# Altium PCB Mother_Board.PcbDoc (part 2 of 2)
Units mil, origin at the board's own origin, x right, y up, seen from the top; angles counter-clockwise.
Board outline 4940 x 2025 mil, 2 copper layers (Top Layer, Bottom Layer), stack 71.6 mil thick; 136 components, 138 nets, 424 pads, 117 vias.
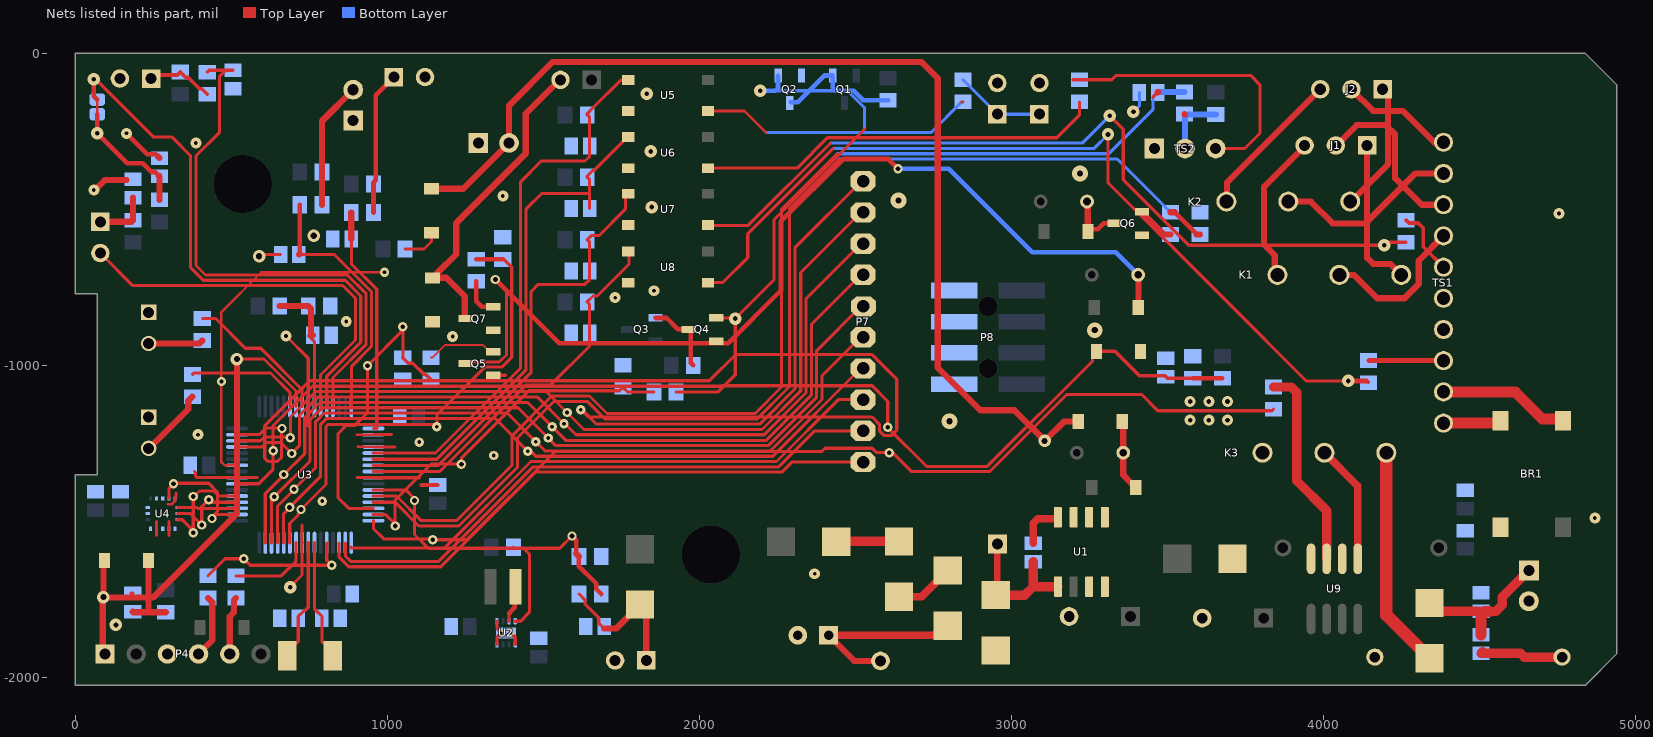
[diagram p2: the nets of this part, all layers, seen from the top]

## Via types
v1: diameter 30, hole 15, Top Layer to Bottom Layer, tented both sides, 29 vias
v2: diameter 40, hole 15, Top Layer to Bottom Layer, tented both sides, 24 vias
v3: diameter 40, hole 20, Top Layer to Bottom Layer, tented both sides, 14 vias
v4: diameter 35, hole 12, Top Layer to Bottom Layer, tented both sides, 13 vias
v5: diameter 30, hole 12, Top Layer to Bottom Layer, tented both sides, 10 vias
v6: diameter 35, hole 15, Top Layer to Bottom Layer, tented both sides, 10 vias
v7: diameter 50, hole 20, Top Layer to Bottom Layer, tented both sides, 9 vias
v8: diameter 30, hole 12.01, Top Layer to Bottom Layer, tented both sides, 3 vias
v9: diameter 19.68, hole 7.87, Top Layer to Bottom Layer, tented top, 2 vias
v10: diameter 30, hole 15, Top Layer to Bottom Layer, 1 vias
v11: diameter 45, hole 20, Top Layer to Bottom Layer, tented both sides, 1 vias
v12: diameter 50, hole 25, Top Layer to Bottom Layer, tented both sides, 1 vias

## Nets (pads, with @x,y where several pads share a name; then routed paths per layer and width w, separated by ;. In a path a pad name is that pad's centre, name@x,y a point inside that pad or via, vN(x,y) a via of type N, cw(c..) or ccw(c..) an arc to the next point about the centre after c; other vN are vias at no path point) (continued)
GND: BR1.4 C2.2 C3.2 C4.2 C5.2 C6.2 C7.2 C8.2 C9.1 C10.2 C11.1 C12.2 C13.2 C14.1 C15.2 C16.2 C17.2 C18.2 C19.2 C20.2 C21.2 C22.2 C23.2 C24.2 C25.2 C26.2 C27.2 C28.2 C30.2 C46.2 C47.2 CONN1.2 CONN3.2 CONN4.2 CONN5.2 CONN6.2 CR4.1 D2.1 D3.2 D4.2 D10.1 P4.3 P5.2 P8.1 P8.2 P8.3 P8.4 Q2.2 Q4.2 Q5.2 Q6.2 Q7.2 R3.1 R5.1 R8.1 R23.2 R37.2 R40.2 R41.1 R43.2 TS1.4 TS1.5 TS2.1 TS3.1 TS4.1 TVS1.1 U1.6 U2.1 U2.4 U2.5 U2.9 U3.9 U3.18 U3.20 U3.25 U3.41 U3.56 U4.5 U4.10 U4.12 U5.3 U6.3 U7.3 U8.3 U9.1 | length 1994.4
  Top Layer w8: 295.33,-1444.66 309.16,-1444.66 309.23,-1444.6 309.93,-1444.6 319.37,-1435.16 ; 901.66,-1222.05 955.5,-1222.05 955.85,-1221.7 ; 904.46,-1261.42 955.5,-1261.42 ; 955.88,-1221.67 1012.81,-1221.67
  Top Layer w10: 178.07,-1730.36 183.79,-1730.36 ; 260.32,-1545 260.32,-1500 ; 299.68,-1545 299.68,-1500 ; 319.37,-1435.16 319.37,-1426.77 319.37,-1424.96 321.98,-1422.35 321.98,-1409.07 ; 381.71,-1340 384.56,-1342.85 384.56,-1353.99 390.42,-1359.85 453.58,-1359.85 517.91,-1359.84 ; 518.5,-1359.84 583.3,-1359.84 ; v3(588.95,-650.62) 594.57,-645 657.68,-645 ; v4(675,-905.67) 746.26,-976.93 746.26,-1131.5 ; v2@689.05,-1709.55 726.57,-1672.03 726.57,-1568.5 ; 726.57,-1512.41 726.57,-1537.11 726.81,-1537.35 726.81,-1568.16 727.16,-1568.5 ; 903.3,-1359.84 955.5,-1359.84 ; 955.5,-1261.42 1023.63,-1261.42 ; 955.85,-1221.7 986.66,-1221.7 ; 986.69,-1221.67 1012.81,-1221.67 ; 1350.94,-1894.8 1350.94,-1871.18 v9(1364.72,-1857.4) 1350.94,-1843.62 1350.94,-1820 ; v9(1396.22,-1857.4) 1410,-1871.18 1410,-1894.8
  Top Layer w12: 746.84,-1192.48 746.84,-1131.5 ; 955.5,-1359.84 1102.3,-1359.84 ; 1108.74,-1383.46 1161.69,-1383.46 ; Q5.2@1339.29,-1031.54 1377.73,-1031.54
  Top Layer w15: v4(163.61,-256.43) 230.81,-323.63 258.15,-323.63 265.53,-331.01
  Top Layer w20: v4@65,-435 93.94,-406.06 163.61,-406.06 ; 265.53,-331.01 270,-335.47
  Bottom Layer w10: v2(3391.2,-187.64) 3410.47,-168.36 C21.2@3410.47,-125
  other v2: 130,-1831.9 689.05,-1710.94 1846.99,-492.68 1843.69,-314.27 1830.94,-129.66
  other v3: 764.45,-584.79
  other v4: 2369.47,-1667.99 4870,-1489.34 393.18,-1222.05 1209.23,-907.58 868.29,-859.41 1730.03,-782.93 1854.57,-760.98 4755,-513.36 1370,-457.44 59.29,-437.65 386.19,-287.09
  other v6: 3572.97,-1175.49 3632.97,-1175.49 3692.97,-1175.49 3572.97,-1115.97 3632.97,-1115.97 3692.97,-1115.97
  other v7: 2801.69,-1179.32 3267.59,-886.9 2638.23,-471.7 3220,-385
  other v8: 791.05,-1435 1341.01,-1288.73 1102.3,-1245.91
Latch_In: R26.1 R27.1 TS2.2 | length 209.8
  Top Layer w20: 3555,-194.72 3556.14,-195.87 3556.57,-196.3
  Bottom Layer w20: R27.1@3556.14,-195.87 R26.1@3655,-195.87 ; TS2.2@3556.57,-305 R27.1@3556.57,-196.3
LCD_Voltage_Control: 
M/CS1: P7.7 U3.44 | length 2344.5
  Top Layer w10: 667.52,-1568.5 667.52,-1475.58 686.61,-1456.49 v1(686.61,-1455.31) 786.16,-1355.77 786.16,-1188.89 805.23,-1169.82 1344.82,-1169.82 v5(1450,-1275) 1453.48,-1275 1456.15,-1272.33 1456.64,-1272.33 1475.55,-1291.24 2235.45,-1291.24 2516.69,-1010 P7.7@2525,-1010
M/RES: P7.6 U3.45 | length 2450.5
  Top Layer w10: 647.83,-1568.5 647.83,-1451.22 700.55,-1398.5 v1(700.55,-1397.55) 769.16,-1328.94 769.16,-1181.85 798.19,-1152.82 1383.82,-1152.82 v5(1476,-1245) 1505.24,-1274.24 2228.07,-1274.24 2392.85,-1109.46 2392.85,-1033.39 2516.24,-910 P7.6@2525,-910
MA0: P7.8 U3.33 | length 1840.3
  Top Layer w10: 884.06,-1582.72 884.06,-1584.39 885.47,-1585.8 1182.74,-1585.8 1460.3,-1308.24 2247.07,-1308.24 2445.32,-1110 P7.8@2525,-1110
MB_1: P7.3 U3.61 | length 2645.4
  Top Layer w10: 517.91,-1261.42 599.08,-1261.42 613.73,-1246.77 657.44,-1246.77 v1(693.16,-1282.49) 718.16,-1257.5 718.16,-1160.73 777.97,-1100.92 1479.92,-1100.92 v5(1566,-1187) 1566,-1183.75 1604.6,-1222.35 2207.84,-1222.35 2341.85,-1088.34 2341.85,-786.21 2518.06,-610 P7.3@2525,-610
MB_2: P7.2 U3.62 | length 2672.5
  Top Layer w10: 517.91,-1241.73 593.31,-1241.73 605.27,-1229.77 686.41,-1229.77 v1(688.38,-1231.74) 689.5,-1230.62 689.5,-1165.35 770.93,-1083.92 1508.92,-1083.92 v5(1576,-1151) 1630.35,-1205.35 2200.8,-1205.35 2324.85,-1081.3 2324.85,-702.58 2517.43,-510 P7.2@2525,-510
MB_3: P7.1 U3.63 | length 5308.4
  Top Layer w10: 517.91,-1222.05 588.95,-1222.05 610.02,-1200.98 661,-1200.98 v1(662.5,-1202.48) 661,-1203.98 661,-1294.97 648.1,-1307.87 617.14,-1307.87 606.83,-1297.57 606.83,-1193.96 751.28,-1049.51 2031.9,-1049.51 2115.9,-965.5 2553.72,-965.5 2632.59,-1044.37 2632.59,-1207.69 2615.18,-1225.09 2592.82,-1225.09 2577,-1209.27 2577,-1188.78 2553.72,-1165.5 1643.2,-1165.5 v5(1620,-1142.3) 1624.3,-1142.3 1670.35,-1188.35 2193.76,-1188.35 2306.15,-1075.96 2306.15,-623.59 2519.74,-410 P7.1@2525,-410
MBK_VOLTAGE_CONTROL: P7.4 U3.47 | length 2665.8
  Top Layer w10: 608.46,-1568.5 608.46,-1411.54 668.1,-1351.9 v1(668.1,-1350) 735.16,-1282.94 735.16,-1167.77 784.11,-1118.82 1449.82,-1118.82 v5(1528,-1197) 1571.24,-1240.24 2213.99,-1240.24 2358.85,-1095.38 2358.85,-869.18 2518.02,-710 P7.4@2525,-710
MLCD_VOLTAGE_CONTROL: P7.5 U3.46 | length 2562.5
  Top Layer w10: 628.15,-1568.5 628.15,-1428.62 637.84,-1418.93 v1(637.84,-1421.33) 752.16,-1307.02 752.16,-1174.81 791.15,-1135.82 1418.82,-1135.82 v5(1516,-1233) 1540.24,-1257.24 2221.03,-1257.24 2375.85,-1102.42 2375.85,-953.01 2517.86,-811 P7.5@2526,-811
MSCL: P7.9 U3.34 | length 1881.6
  Top Layer w10: 865.3,-1569.43 865.3,-1610.85 882.75,-1628.3 1164.29,-1628.3 1467.34,-1325.24 2254.12,-1325.24 2369.36,-1210 P7.9@2525,-1210
MSI: P7.10 U3.35 | length 1877
  Top Layer w10: 845.27,-1569.09 845.27,-1614.86 875.71,-1645.3 1171.33,-1645.3 1474.39,-1342.24 2264.36,-1342.24 2296.6,-1310 P7.10@2525,-1310
NetBR1_1: BR1.1 TS1.1 | length 185.1
  Top Layer w35: TS1.1@4385,-1185 4559.58,-1185 BR1.1@4567.05,-1177.53
NetBR1_2: BR1.2 TS1.2 | length 418.7
  Top Layer w35: TS1.2@4385,-1085 4615.24,-1085 4701.69,-1171.46 4767.67,-1171.46 BR1.2@4767.84,-1171.62
NetC1_1: C1.1 CR4.2 L2.1 U1.8 | length 456
  Top Layer w20: CR4.2@2950,-1736.42 2955,-1731.42 L2.1@2955,-1572.87
  Top Layer w30: CR4.2@2950,-1736.42 3042.83,-1736.42 3070.03,-1709.22 U1.8@3149.4,-1709.22 ; 3070,-1709.25 3070,-1629.53
NetC1_2: C1.2 U1.1 | length 149.3
  Top Layer w25: 3070,-1570.47 3070,-1506.32 3084.64,-1491.68 U1.1@3149.1,-1491.68
NetC5_1: C5.1 CR1.1 L2.2 | length 618.5
  Top Layer w20: C5.1@2414.21,-1865 2496.61,-1947.4 L2.2@2580.6,-1947.4 ; CR1.1@2751.46,-1865 CR1.1@2780,-1836.46
  Top Layer w25: C5.1@2414.21,-1865 2751.46,-1864.99 CR1.1@2780,-1836.46
NetC8_1: C8.1 CONN1.1 CR5.1 R2.2 | length 478.5
  Top Layer w10: 1614.57,-1732.87 1633.19,-1751.5 1633.19,-1763.92 1677.87,-1808.6 1677.87,-1826.65 1694.53,-1843.31
  Top Layer w20: 1694.53,-1843.31 1727.52,-1843.31 ; 1727.54,-1843.33 1733.13,-1843.33 CR5.1@1810,-1766.46 1830,-1786.46 CONN1.1@1830,-1945.79
NetC9_2: C9.2 U3.39 Y1.1 | length 376.2
  Top Layer w10: 766.53,-1568.5 766.87,-1568.85 766.87,-1599.66 767.04,-1599.82 767.04,-1781.15 773.76,-1787.87 773.82,-1787.87 790.47,-1804.53 790.47,-1885.91 Y1.1@825,-1920.43
NetC10_1: C10.1 U3.40 Y1.2 | length 381.1
  Top Layer w10: Y1.2@679.33,-1920.43 714.53,-1885.24 714.53,-1804.53 731.18,-1787.87 733.63,-1787.87 746.26,-1775.24 746.26,-1568.5
NetC11_2: C11.2 R4.1 R5.2 U3.10 | length 424.6
  Top Layer w10: 747.63,-905 765.94,-923.31 765.94,-1131.5
  Top Layer w20: 655.43,-810 746.35,-810 755.67,-819.32 755.67,-898.71 760.67,-903.71
NetC16_1: C16.1 D2.2 R7.1 R8.2 U3.55 | length 3726.3
  Top Layer w10: 517.91,-1379.53 587.66,-1379.53 634,-1333.18 v1(634,-1273.77) 634,-1192.8 759.88,-1066.92 2069.02,-1066.92 2070.44,-1065.5 2553.72,-1065.5 2604,-1115.78 v1(2604,-1198.09) 2604,-1199.71 2727.92,-1323.63 2923.07,-1323.63 3260.64,-986.07 3260.64,-967.15 D2.2@3272.75,-955.04
  Top Layer w12: D2.2@3272.75,-955.04 3331.87,-955.04 3409.77,-1032.94 3491.96,-1032.94 3495.12,-1036.1 3500.35,-1041.33 3581.57,-1041.33
  Top Layer w15: 3581.57,-1041.33 3676.3,-1041.33
NetC17_1: C17.1 pad.1 pad.2 R11.2 U3.12 | length 2260.6
  Top Layer w7: 70.16,-195.06 70.16,-148.06
  Top Layer w10: v2(59.29,-83.41) 64.85,-83.41 249.17,-267.73 308.46,-267.73 369.48,-328.74 369.48,-661.67 369.48,-686.9 409.98,-727.4 435.22,-727.4 864.8,-727.4 914.88,-777.48 914.88,-925.63 805.9,-1034.61 805.9,-1130.91
  Top Layer w15: v2(59.29,-83.41) 59.29,-137.19 70.16,-148.06 ; 70.16,-195.06 v2(70.16,-255.71) 166.4,-351.95 215.99,-351.95 244.41,-380.37 255.85,-380.37 266.62,-391.15
  Top Layer w20: 266.62,-391.15 270,-394.53 270,-469.57
NetC18_1: C18.1 CONN2.1 R12.2 | length 179
  Top Layer w20: CONN2.1@80,-540 179.57,-540 185,-534.57 185,-462.83
NetC19_1: C19.1 CR7.1 R13.1 | length 273.7
  Top Layer w20: 183.79,-1789.42 185.89,-1791.52 234.37,-1791.52 ; CR7.1@234.37,-1624.88 234.37,-1791.52 ; 290,-1791.52 234.37,-1791.52
NetC20_1: C20.1 R18.2 U3.13 | length 1737.7
  Top Layer w10: 422.86,-60.26 429,-54.12 ; 505.36,-54.35 505.13,-54.12 481.59,-54.12 462.42,-73.28 462.42,-252.58 386.48,-328.52 386.48,-679.86 417.03,-710.4 871.84,-710.4 931.88,-770.44 931.88,-932.67 825.58,-1038.96 825.58,-1130.91
  Top Layer w12: 429,-54.12 481.59,-54.12
NetC21_1: C21.1 R27.2 U3.28 | length 3660.4
  Top Layer w10: 954.92,-1418.9 1029.29,-1418.9 1108.2,-1497.8 1221.67,-1497.8 1399.98,-1319.49 1399.98,-1252.17 1399.98,-1225.46 1527.14,-1098.3 1553.86,-1098.3 1647.96,-1098.3 1703.84,-1154.18 2178.78,-1154.18 2263.43,-1069.53 2263.43,-499.33 2441.08,-321.67 ; 3453.55,-140.98 3469.53,-125
  Top Layer w20: 3469.53,-125 3470.67,-123.86
  Bottom Layer w10: 2441.08,-321.67 3312.3,-321.67 3453.55,-180.43 C21.1@3453.55,-140.98
  Bottom Layer w20: C21.1@3470.67,-123.86 R27.2@3555,-123.86
NetC22_1: C22.1 R28.1 U3.21 U5.4 | length 1753.9
  Top Layer w10: 954.92,-1281.1 1154.39,-1281.1 1426.99,-1008.5 1426.99,-411.03 1493.02,-345 1633.43,-345 1648.31,-330.12 1648.31,-297.14 1648.31,-205.01 1640.43,-197.14 1640.43,-193.2 1659.06,-174.58 1747.66,-85.97 1771.07,-85.97 U5.4@1772.05,-85
NetC23_1: C23.1 R29.1 U3.22 U6.4 | length 1642
  Top Layer w10: 954.92,-1300.79 1158.75,-1300.79 1443.99,-1015.55 1443.99,-499.67 1494.61,-449.05 1648.31,-449.05 ; 1648.31,-497.14 1648.31,-449.05 ; U6.4@1774.09,-267.86 1768.25,-267.86 1757.36,-278.75 1757.36,-280.21 1662.99,-374.58 1659.06,-374.58 1640.43,-393.2 1640.43,-397.14 1648.31,-405.01 1648.31,-449.05
NetC24_1: C24.1 R30.1 U3.23 U7.4 | length 1438.2
  Top Layer w10: 954.92,-1320.47 1163.11,-1320.47 1460.99,-1022.59 1460.99,-763.49 1483.88,-740.6 1632.83,-740.6 1648.31,-725.12 1648.31,-697.14 1648.31,-605.01 1640.43,-597.14 1653.5,-584.08 1678.45,-584.08 1762.68,-499.84 1762.68,-460.75 U7.4@1772.24,-451.19
NetC25_1: C25.1 R31.1 U3.24 U8.4 | length 1230.3
  Top Layer w10: 954.92,-1340.16 1167.46,-1340.16 1445.17,-1062.45 1523.78,-1062.45 1648.31,-937.92 1648.31,-897.14 1648.31,-805.01 1640.43,-797.14 1640.43,-796.28 1659.06,-777.66 1673.2,-777.66 1774.09,-676.76 U8.4@1774.09,-634.53
NetC26_1: C26.1 R33.2 U3.17 | length 736
  Top Layer w10: 884.53,-595.2 884.53,-675 965.88,-756.35 965.88,-1201.53 965.04,-1202.36 955.5,-1202.36
  Top Layer w20: 884.53,-595.2 884.57,-595.16 884.57,-510
NetC27_1: C27.1 R35.2 U3.16 | length 836.5
  Top Layer w10: 716.73,-645 830.48,-645 948.88,-763.39 948.88,-939.71 884.64,-1003.95 884.64,-1130.91
  Top Layer w15: 719.57,-642.17 719.57,-485
  Top Layer w20: 716.73,-645 719.57,-642.17
NetC29_1: C29.1 C30.1 D8.2 P5.1 | length 465.5
  Top Layer w30: D8.2@4340,-1761.42 4366.45,-1787.87 4499.91,-1787.87 ; 4532.86,-1789.11 4552.63,-1789.11 4573.73,-1768.02 4573.73,-1742.26 P5.1@4658.55,-1657.44
  Top Layer w35: 4505.31,-1863.78 4505.31,-1797.42 4507.81,-1794.92 4512.87,-1794.92 4512.87,-1791.61 4515.37,-1789.11 4532.86,-1789.11
NetC29_2: C29.2 R41.2 | length 273.1
  Top Layer w30: 4511.22,-1916.93 4505.31,-1922.83 4631.96,-1922.83 4644.12,-1935 R41.2@4765,-1935
NetCONN2_2: CONN2.2 U3.11 | length 1271.2
  Top Layer w10: CONN2.2@80,-640 184.4,-744.4 857.76,-744.4 897.88,-784.52 897.88,-918.59 785.63,-1030.83 785.63,-1131.5
NetCONN3_1: CONN3.1 CONN4.1 R21.2 | length 291
  Top Layer w10: CONN4.1@2955,-195 CONN4.1@2955,-194.57
  Bottom Layer w10: R21.2@2845,-84.57 CONN4.1@2955,-194.57 ; CONN4.1@2955,-195 CONN3.1@3090,-195
NetCONN5_1: CONN5.1 R17.1 R18.1 | length 218.5
  Top Layer w12: CONN5.1@242.59,-80.73 254.33,-68.99 326.92,-68.99 336.13,-59.79 353.75,-77.41 361.63,-77.41 397.73,-113.5 405.24,-113.5 422.86,-131.13
NetCONN6_1: CONN6.1 R32.1 R33.1 | length 461.1
  Top Layer w15: 955.43,-510 955.43,-414.4 963.08,-406.75 963.08,-133.76 CONN6.1@1020.83,-76.01
NetCONN7_2: CONN7.2 D10.2 Q7.3 | length 1003.9
  Top Layer w20: D10.2@1144.84,-719.53 1158.86,-719.53 1188.99,-719.53 1248.24,-778.77 1248.24,-848.19 1248.9,-848.19 Q7.3@1250.71,-850 ; D10.2@1150.94,-719.53 1158.86,-711.61 1158.86,-705.51 1220.98,-643.39 1220.98,-543.73 1443.68,-321.03 1443.68,-193.93 1552.61,-85 CONN7.2@1555,-85
NetCR1_2: CR1.2 CR2.1 | length 190.5
  Top Layer w25: CR2.1@2640,-1741.46 2712.05,-1741.46 CR1.2@2795.79,-1657.72
NetCR2_2: CR2.2 CR3.1 | length 201.7
  Top Layer w20: CR3.1@2438.58,-1565 CR3.1@2439.29,-1564.29
  Top Layer w30: CR3.1@2439.29,-1564.29 CR2.2@2640,-1564.29
NetCR7_2: CR7.2 P4.1 U3.7 | length 1612.2
  Top Layer w10: v3(517.91,-979.8) 604.54,-979.8 707.13,-1082.39 707.13,-1131.26 706.89,-1131.5
  Top Layer w20: CR7.2@93.42,-1624.88 90,-1628.3 v3(90,-1742.47) 87.82,-1744.64 87.82,-1917.82 P4.1@95,-1925 ; v3@98.82,-1744.22 248.81,-1744.22 517.91,-1475.11 v3(517.91,-979.8)
NetD1_1: D1.1 R6.1 U3.58 | length 1234
  Top Layer w8: 518.5,-1320.47 518.31,-1320.29 478.48,-1320.29 468.18,-1309.99 v5(468.18,-1051.72) 468.18,-829.16 595.72,-701.62 v5(990.94,-701.62)
  Top Layer w10: 1056.61,-627 1056.69,-627.08 1117.32,-627.08 1141.41,-602.99 1141.41,-575.53 D1.1@1141.9,-575.04
NetD1_2: D1.2 D9.2 TS3.2 | length 3385.9
  Top Layer w20: D1.2@1140,-434.06 1243.04,-434.06 TS3.2@1390,-287.09 1390,-167.15 1529.76,-27.4 2711.35,-27.4 2764.15,-80.2 2764.15,-1007.16 2900.99,-1144 3009.67,-1144 3106.49,-1240.82 v3(3106.49,-1242.15) 3107.56,-1242.15 3169.71,-1180 D9.2@3214.53,-1180
NetD3_1: D3.1 R9.1 | length 176
  Top Layer w20: D3.1@235,-930 397.43,-930 407,-920.43
NetD4_1: D4.1 R10.1 | length 224.6
  Top Layer w20: D4.1@235,-1267 361.48,-1140.52 361.48,-1113.95 375,-1100.43
NetD5_1: D5.1 K1.5 Q5.3 | length 3176.4
  Top Layer w10: Q5.3@1250.71,-994.13 1256.14,-988.71 1359.57,-988.71 1381.62,-966.65 1381.62,-759.94 v10(1346.38,-724.7)
  Top Layer w15: v10(1346.38,-724.7) 1550.32,-928.63 2092.83,-928.63 2261.42,-760.05 2261.42,-538.6 2461.35,-338.67 2605.96,-338.67 v1(2636.86,-369.58)
  Top Layer w20: D5.1@3406.83,-815 3407.17,-814.67 K1.5@3407.17,-710
  Bottom Layer w15: v1(2636.86,-369.58) 2798.69,-369.58 3066.99,-637.89 3334.27,-637.89 K1.5@3406.38,-710
NetD6_1: D6.1 K2.5 Q6.3 | length 191.1
  Top Layer w15: D6.1@3245,-570 3251.19,-563.81 3277.1,-563.81 3295.91,-545 Q6.3@3330.71,-545
  Top Layer w20: D6.1@3245,-570 K2.5@3245,-475
NetD7_1: D7.1 D9.1 K3.5 | length 237.8
  Top Layer w20: D9.1@3360.94,-1180 3358.54,-1182.4 K3.5@3358.54,-1280 3358.54,-1351.46 3384.65,-1377.56 3390.75,-1377.56 3398.66,-1385.47 D7.1@3398.66,-1391.57 ; D7.1@3392.79,-1403.77 D7.1@3396.33,-1400.23
NetD8_1: D8.1 K3.3 | length 715.8
  Top Layer w40: K3.3@4201.85,-1280 4201.85,-1800.43 D8.1@4340,-1938.58
NetJ1_1: J1.1 K1.3 | length 490.3
  Top Layer w20: J1.1@4140,-297.14 4140,-655 4159.84,-674.84 4214.53,-674.84 K1.3@4249.69,-710
NetJ1_2: J1.2 TS1.8 | length 560.4
  Top Layer w20: J1.2@4040,-297.14 4107.14,-230 4200,-230 4230,-260 4230,-400 4315,-485 TS1.8@4385,-485
NetJ1_3: J1.3 K1.2 | length 484.5
  Top Layer w20: K1.2@3852.83,-710 3844.41,-701.57 3844.41,-647.08 3810,-612.68 3810,-427.14 J1.3@3940,-297.14
NetJ2_1: J2.1 K2.3 | length 416.1
  Top Layer w20: K2.3@4088.31,-475 4206.85,-356.46 4206.85,-131.85 J2.1@4190,-115
NetJ2_2: J2.2 TS1.10 | length 365.4
  Top Layer w20: J2.2@4090,-115 4159.53,-184.53 4254.53,-184.53 4355,-285 TS1.10@4385,-285
NetJ2_3: J2.3 K2.2 | length 483.7
  Top Layer w20: K2.2@3691.46,-475 3691.46,-413.54 J2.3@3990,-115
NetK1_1: K1.1 TS1.7 | length 491.6
  Top Layer w20: K1.1@4051.26,-710 4097.86,-710 4172.86,-785 4260,-785 4305.86,-739.14 4305.86,-664.14 TS1.7@4385,-585
NetK2_1: K2.1 TS1.9 | length 590.4
  Top Layer w20: K2.1@3889.88,-475 3960,-475 4030,-545 4135,-545 4295,-385 TS1.9@4385,-385
NetK3_1: K3.1 U9.4 | length 384.4
  Top Layer w25: K3.1@4003.43,-1280 4110.45,-1387.03 U9.4@4110.45,-1620.04
NetK3_2: K3.2
NetL3_1: L3.1 U2.7 | length 118.4
  Top Layer w10: 1390.32,-1820 1390.32,-1796.69
  Top Layer w15: 1390.32,-1796.69 1390.32,-1794.23 1408.66,-1775.88 1408.66,-1711.93 L3.1@1410.59,-1710
NetP4_4: P4.4 R14.1 | length 203.3
  Top Layer w20: P4.4@395,-1925 438.61,-1881.39 438.61,-1759.05 425,-1745.43
NetP4_5: P4.5 R15.1 | length 187.9
  Top Layer w20: P4.5@495,-1925 495,-1805.12 508.11,-1792.01 508.11,-1752.32 515,-1745.43
NetP4_6: 
NetQ1_1: Q1.1 Q2.3 R16.1 | length 404.4
  Bottom Layer w15: Q2.3@2292.61,-156.68 2315.52,-156.68 2401.49,-70.71 Q1.1@2427.6,-70.71 2427.6,-110.58 2436.39,-119.37 2494.7,-119.37 2525.76,-150.43 R16.1@2605,-150.43
NetQ2_1: Q2.1 Q4.1 R20.1 | length 1759
  Top Layer w10: 1925.43,-1085 2060,-1085 2115,-1030 v2(2115,-850) ; Q4.1@2054.29,-847.6 2112.6,-847.6 v2(2115,-850) ; 2529.49,-242.95 2239.42,-533.02 2239.42,-725.58 v2(2115,-850)
  Bottom Layer w10: v2(2195,-120) 2475,-120 2529.49,-174.49 2529.49,-242.95
  Bottom Layer w15: v2(2195,-120) 2243.26,-120 2252.05,-111.21 Q2.1@2252.05,-71.26
NetQ3_1: Q3.1 Q4.3 R25.1 | length 244.6
  Top Layer w15: 1859.29,-847.6 1859.9,-848.21 1894.95,-848.21 1930.59,-883.85 1964.56,-883.85 Q4.3@1965.71,-885 1968.42,-885 1972.73,-889.31 1972.73,-992.3 1980.43,-1000
NetQ5_1: Q5.1 R36.1 | length 235.8
  Top Layer w6: 1140,-975.35 1143.94,-975.35 1184.21,-935.08 1306.81,-935.08 1328.46,-956.73 Q5.1@1339.29,-956.73
  Top Layer w12: Q5.1@1339.29,-956.73 Q5.1@1350.12,-956.73
NetQ6_1: Q6.1 R39.1 | length 120.9
  Top Layer w15: Q6.1@3419.29,-507.6 3492.13,-580.43
  Top Layer w20: 3492.13,-580.43 3510.04,-580.43
NetQ7_1: Q7.1 R42.1 | length 125.9
  Top Layer w15: 1285,-730.43 1285,-794.6 1303,-812.6 Q7.1@1339.29,-812.6
NetR1_1: R1.1 U2.8 | length 304.4
  Top Layer w10: 1404.09,-1582.72 1407.76,-1586.38 1436.86,-1586.38 1455.32,-1604.85 1455.32,-1791.85 1427.17,-1820 1410,-1820
NetR2_1: R2.1 R3.2 U3.27 | length 1023.3
  Top Layer w10: 954.92,-1399.21 1058.42,-1399.21 1087.07,-1427.87 v1(1087.07,-1433.09) ; v1(1087.07,-1433.09) 1087.08,-1542.15 1131.25,-1586.33 1552.31,-1586.33 v1(1591.9,-1546.74)
  Top Layer w15: v1(1591.9,-1546.74) 1605,-1559.84 1605,-1603.31 ; 1614.57,-1612.87 1613.82,-1613.62 1613.82,-1643.71 1669.31,-1699.2 1669.31,-1716.75 1685.43,-1732.87
  Top Layer w20: 1605,-1603.31 1614.57,-1612.87
NetR9_2: R9.2 U3.8 | length 468
  Top Layer w10: 407,-849.57 449.37,-849.57 544.81,-945 593.78,-945 726.57,-1077.8 726.57,-1100.11 726.81,-1100.34 726.81,-1131.26 726.57,-1131.5
NetR10_2: R10.2 U3.6 | length 384.7
  Top Layer w10: 375,-1029.57 379.85,-1024.72 625.41,-1024.72 687.44,-1086.75 687.44,-1131.26
NetR14_2: R14.2 U3.37 | length 506.2
  Top Layer w10: 425,-1674.57 479.57,-1620 v1(540,-1620) 560.7,-1640.7 v1(821.84,-1640.7) 805.9,-1624.76 805.9,-1569.09
NetR15_2: R15.2 U3.42 | length 270.9
  Top Layer w10: 515,-1674.57 660.33,-1674.57 707.47,-1627.43 707.47,-1568.5
NetR19_1: R19.1 U7.2 | length 2650.8
  Top Layer w10: U7.2@2030,-551.19 2156.84,-551.19 2420.36,-287.67 ; v2(3315,-200) 3358.54,-243.54 3358.54,-404.73 3568.81,-615 v2(4195,-615) 4204.57,-605.43 4265,-605.43
  Bottom Layer w10: 2420.36,-287.67 3227.33,-287.67 v2(3315,-200)
NetR19_2: R19.2 TS1.6 | length 217.4
  Top Layer w12: 4265,-534.57 4274.04,-543.6 4303.53,-543.6 4320,-560.07 4320,-620 TS1.6@4385,-685
NetR20_2: R20.2 R23.1 U3.31 | length 1170.2
  Top Layer w10: 954.92,-1477.95 955.27,-1478.3 994.47,-1478.3 1021.17,-1505 1021.17,-1511.17 v1(1025,-1515) 1025,-1431.53 1140.06,-1316.47 1236.47,-1316.47 v1(1237.38,-1317.38) 1237.38,-1297.22 1453.3,-1081.3 1744.13,-1081.3 1755,-1070.43 1769.57,-1085 1854.57,-1085
NetR21_1: R21.1 U5.2 | length 884.3
  Top Layer w10: U5.2@2030,-184.53 2144.53,-184.53 2213.67,-253.67 ; 2841.06,-155.43 2845,-155.43
  Bottom Layer w10: 2213.67,-253.67 2742.82,-253.67 R21.1@2841.06,-155.43
NetR22_1: R22.1 U6.2 | length 1301.2
  Top Layer w10: U6.2@2030,-367.86 2313.23,-367.86 2410.42,-270.67 3145.82,-270.67 3218,-198.5 3218,-155.43
NetR24_1: R24.1 U8.2 | length 2776.7
  Top Layer w10: U8.2@2030,-734.53 2075.47,-734.53 2155,-655 2155,-578.44 2428.77,-304.67 ; v2@3309.72,-260.28 v2(3309.72,-260) 3309.72,-414.72 3690,-795 3945,-1050 v2(4080,-1050) ; 4139.57,-1050 4145,-1055.43
  Top Layer w15: v2(4080,-1050) 4139.57,-1050
  Bottom Layer w10: 2428.77,-304.67 3265.33,-304.67 v2@3309.72,-260.28
NetR24_2: R24.2 TS1.3 | length 240.2
  Top Layer w12: TS1.3@4384.57,-984.57 TS1.3@4385,-985
  Top Layer w15: 4145,-984.57 TS1.3@4384.57,-984.57
NetR34_1: R34.1 R35.1 TS4.2 | length 413.8
  Top Layer w20: 790.43,-485 790.43,-376.06 ; 790.43,-380 790.43,-216.74 TS4.2@890.54,-116.63
NetR36_2: R36.2 R37.1 U3.30 | length 996.9
  Top Layer w10: 955.5,-1458.27 875.93,-1458.27 841.62,-1423.96 841.62,-1219.14 868.29,-1192.48 895.32,-1192.48 936.18,-1151.62 v1(936.18,-1001.05) 1049.52,-887.7 v1(1049.52,-876.15) ; 1049.53,-975.35 v1(1049.52,-876.15)
  Top Layer w12: 1049.53,-975.35 1067.15,-992.98 1081.63,-992.98 1117.25,-1028.6 1122.38,-1028.6 1140,-1046.22
NetR38_1: R38.1 U3.32 | length 3203.5
  Top Layer w10: 955.5,-1497.64 955.5,-1523.49 988.02,-1556 1143.15,-1556 v1(1145.95,-1558.8) 1255.01,-1558.8 1537.95,-1275.86 2392.14,-1275.86 2402.5,-1265.5 2553.72,-1265.5 2568.05,-1279.83 v1(2609.12,-1279.83) 2619.83,-1279.83 2680.63,-1340.63 2930.14,-1340.63 3177.22,-1093.56 3417.6,-1093.56 3469.54,-1145.5 3834.93,-1145.5 3840,-1140.43
NetR38_2: R38.2 U9.2 | length 654.7
  Top Layer w30: 3840,-1069.57 3897.43,-1069.57 3915,-1087.14 3915,-1370 4010.45,-1465.45 U9.2@4010.45,-1620.04
NetR39_2: R39.2 R40.1 U3.29 | length 3704.4
  Top Layer w10: 954.92,-1438.58 1024.93,-1438.58 1101.16,-1514.8 1228.71,-1514.8 1416.98,-1326.53 1416.98,-1303.48 1416.98,-1232.5 1534.18,-1115.3 1640.91,-1115.3 1696.8,-1171.18 2159.84,-1171.18 2185.82,-1171.18 2289.15,-1067.85 2289.15,-497.65 2448.13,-338.67
  Top Layer w15: 3523.37,-509.57 3594.24,-580.43
  Top Layer w20: 3510.04,-509.57 3523.37,-509.57 ; 3594.24,-580.43 3605,-580.43
  Bottom Layer w10: 2448.13,-338.67 3339.15,-338.67 R39.2@3510.04,-509.57
NetR42_2: R42.2 R43.1 U3.43 | length 1548.4
  Top Layer w10: 687.2,-1568.5 687.2,-1506.85 713.06,-1481 713.06,-1477.45 722.99,-1467.52 v1(722.99,-1462.11) 803.16,-1381.93 803.16,-1195.94 809.02,-1190.08 1145.89,-1190.08 1152.63,-1196.82 v5(1158.05,-1196.82) 1159.33,-1195.54 1159.33,-1158.09 1311.71,-1005.71 1366.61,-1005.71 1398.62,-973.69 1398.62,-685.12 1373.07,-659.57 1369.13,-659.57
  Top Layer w15: 1285,-659.57 1369.13,-659.57
NetU1_2: U1.2
NetU1_3: U1.3
NetU1_4: U1.4
NetU1_5: U1.5
NetU3_1: 
NetU3_2: 
NetU3_3: 
NetU3_4: 
NetU3_5: 
NetU3_14: 
NetU3_15: 
NetU3_36: 
NetU3_48: 
NetU3_49: 
NetU3_50: U3.50 U4.4 | length 385.2
  Top Layer w10: 299.68,-1426.77 299.68,-1395.32 314.45,-1380.55 v1(314.45,-1379.45) 314.59,-1379.45 315.07,-1379.93 317,-1378 428,-1378 455.76,-1405.76 455.76,-1467.85 438,-1485.61 v1(438,-1491) 440.81,-1491 453.86,-1477.95 517.91,-1477.95
NetU3_51: U3.51 U4.6 | length 191.5
  Top Layer w10: 328.23,-1455.31 388.48,-1455.31 391.43,-1458.27 518.5,-1458.27
NetU3_52: U3.52 U4.7 | length 278.8
  Top Layer w10: 328.23,-1475 368.33,-1475 v1(405,-1511.67) 405,-1457.4 403.41,-1455.81 403.41,-1454.96 v1(427.9,-1430.48) 427.9,-1433.05 433.43,-1438.58 517.91,-1438.58
NetU3_53: U3.53 U4.8 | length 342
  Top Layer w10: 328.23,-1494.68 342.69,-1494.68 378,-1530 v1(378,-1537) v1(378,-1420.24) 380.27,-1420.24 397.71,-1402.79 442.79,-1402.79 458.9,-1418.9 517.91,-1418.9
NetU3_54: 
NetU3_59: 
NetU3_60: 
NetU3_64: 
NetU4_2: U4.2
NetU4_3: U4.3
NetU4_9: U4.9
NetU4_11: U4.11
NetU4_13: U4.13
NetU4_15: U4.15
NetU4_16: U4.16
NetU9_3: U9.3
OKC_In: R22.2 TS2.3 | length 935.4
  Top Layer w10: 3197.23,-84.57 3322.22,-84.57 3336.08,-70.71 3767.01,-70.71 3796.48,-100.18 3796.48,-257.02 3748.5,-305 TS2.3@3655,-305
SCL: 
SI: 
pads on no net: H1.0 H2.0 P4.6 P8.0 U3.1 U3.2 U3.3 U3.4 U3.5 U3.14 U3.15 U3.36 U3.48 U3.49 U3.54 U3.59 U3.60 U3.64

## Polygon pours and split planes (outlines as drawn)
GND on Bottom Layer "Bottom Layer-GND" (solid, remove dead copper, shelved, pour order 4): -3.97,-2018.44 -3.97,-1343.44 66.03,-1343.44 66.03,-763.44 -3.97,-763.44 -3.97,6.56 4836.03,6.56 4936.03,-93.44 4936.03,-1918.44 4836.03,-2018.44
GND on Top Layer "Tope Layer - GND" (solid, remove dead copper, shelved, pour order 6): 0,-2025 0,-1350 70,-1350 70,-770 0,-770 0,0 4840,0 4940,-100 4940,-1925 4840,-2025

## Keep-outs
Top Layer:
  circle w10: c536,-418.7 r109.05
  circle w10: c2036,-1606.3 r109.05
  lines w1: 608.46,-1700 608.94,-1700.47
  lines w10: 1127.89,-2004.98 1125.62,-1793.67 1125.62,-1721.82 1175.24,-1672.21 1444.45,-1402.01 1941.54,-1402.01 2944.56,-1402.01 3231.57,-1115 3415,-1115 3500,-1200 3950,-1200 4145,-1200 4310,-1035 4840,-1035
  lines w20: 1127.7,-1999.44 1127.7,-1715.36 1160,-1690 1466.63,-1383.37 2967.29,-1382.71 3235,-1115 3415,-1115 3500,-1200 3795,-1200 ; 1900,-25 1900,-740 1940,-780 2187.14,-780 2205,-797.86 2205,-1028.4 2104.79,-1128.6 ; 3790,-1200 3880,-1200 3950,-1200 4145,-1200 4310,-1035 4844,-1035
Bottom Layer:
  circle w10: c2036,-1606.3 r109.05
  circle w10: c536,-418.7 r109.05
Keep-Out Layer:
  the board outline again, w1

## Other copper
Top Layer:
  region net NetD1_1: 1030,-1089.17
  text "PCB 107026 revA0" at 4808.17,-87.74 h30

## Silkscreen, mask and mechanical layers (free items; w line width, h text height)
Top Overlay:
  text "NO" at 4254.53,-129.22 h30
  text "NC" at 3875.48,-131.27 h30
  text "NC" at 3827.33,-311.75 h30
  text "NO" at 4206.85,-311.75 h30
  text "1" at 124.82,-1851.92 h50 r90
  text "PWA 107027" at 849.85,-1913.79 h60
Bottom Overlay:
  text "1" at 2562.99,-304.67 h50 r90
  text "GRN" at 335.4,-763.4 h30
  text "RED" at 320,-1095 h30
Drill Drawing:
  drawing of 310 lines, arcs and shapes, not listed
  text "Symbol" at 5920.88,2084.6 h72
  text "Count" at 6426.76,2084.6 h72
  text "Hole Size" at 7026.6,2084.6 h72
  text "Plated" at 8176.26,2084.6 h72
  text "Hole Type" at 8682.14,2084.6 h72
  text "1" at 6426.76,1934.6 h60
  text "25.00mil (0.635mm)" at 7026.6,1934.6 h60
  text "PTH" at 8176.26,1934.6 h60
  text "Round" at 8682.14,1934.6 h60
  text "Layer" at -525.65,1822.6 h100
  text "Name" at 144.2,1822.6 h100
  text "Material" at 2280.25,1822.6 h100
  text "Thickness" at 3200.02,1822.6 h100
  text "Constant" at 4269.75,1822.6 h100
  text "Gerber" at 5206.18,1822.6 h100
  text "Board Layer Stack" at 5976,1822.6 h100
  text "2" at 6426.76,1784.6 h60
  text "7.87mil (0.200mm)" at 7026.6,1784.6 h60
  text "PTH" at 8176.26,1784.6 h60
  text "Round" at 8682.14,1784.6 h60
  text "2" at 6426.76,1634.6 h60
  text "30.00mil (0.762mm)" at 7026.6,1634.6 h60
  text "PTH" at 8176.26,1634.6 h60
  text "Round" at 8682.14,1634.6 h60
  text "Top Overlay" at 144.2,1622.6 h100
  text "GTO" at 5206.18,1622.6 h100
  text "2" at 6426.76,1484.6 h60
  text "35.04mil (0.890mm)" at 7026.6,1484.6 h60
  text "PTH" at 8176.26,1484.6 h60
  text "Round" at 8682.14,1484.6 h60
  text "1" at -525.65,1422.6 h100
  text "Top Layer" at 144.2,1422.6 h100
  text "Conductive Ink" at 1680.44,1422.6 h100
  text "3.50mil" at 3200.02,1422.6 h100
  text "GTL" at 5206.18,1422.6 h100
  text "2" at 6426.76,1334.6 h60
  text "62.00mil (1.575mm)" at 7026.6,1334.6 h60
  text "NPTH" at 8176.26,1334.6 h60
  text "Round" at 8682.14,1334.6 h60
  text "C" at 5891.79,1324.61 h66.67
  text "2" at -525.65,1222.6 h100
  text "Bottom Layer" at 144.2,1222.6 h100
  text "Conductive Ink" at 1680.44,1222.6 h100
  text "3.50mil" at 3200.02,1222.6 h100
  text "GBL" at 5206.18,1222.6 h100
  text "2" at 6426.76,1184.6 h60
  text "187.00mil (4.750mm)" at 7026.6,1184.6 h60
  text "NPTH" at 8176.26,1184.6 h60
  text "Round" at 8682.14,1184.6 h60
  text "D" at 5891.79,1174.61 h66.67
  text "3" at 6426.76,1034.6 h60
  text "12.01mil (0.305mm)" at 7026.6,1034.6 h60
  text "PTH" at 8176.26,1034.6 h60
  text "Round" at 8682.14,1034.6 h60
  text "Bottom Overlay" at 144.2,1022.6 h100
  text "GBO" at 5206.18,1022.6 h100
  text "4" at 6426.76,884.6 h60
  text "33.47mil (0.850mm)" at 7026.6,884.6 h60
  text "PTH" at 8176.26,884.6 h60
  text "Round" at 8682.14,884.6 h60
  text "Total board thickness:" at -525.65,822.6 h100
  text "73.60mil" at 3200.02,822.6 h100
  text "4" at 6426.76,734.6 h60
  text "34.00mil (0.864mm)" at 7026.6,734.6 h60
  text "PTH" at 8176.26,734.6 h60
  text "Round" at 8682.14,734.6 h60
  text "4" at 6426.76,584.6 h60
  text "35.00mil (0.889mm)" at 7026.6,584.6 h60
  text "PTH" at 8176.26,584.6 h60
  text "Round" at 8682.14,584.6 h60
  text "A" at 5891.79,574.61 h66.67
  text "6" at 6426.76,434.6 h60
  text "24.69mil (0.627mm)" at 7026.6,434.6 h60
  text "PTH" at 8176.26,434.6 h60
  text "Round" at 8682.14,434.6 h60
  text "6" at 6426.76,284.6 h60
  text "36.00mil (0.914mm)" at 7026.6,284.6 h60
  text "PTH" at 8176.26,284.6 h60
  text "Round" at 8682.14,284.6 h60
  text "9" at 6426.76,134.6 h60
  text "44.37mil (1.127mm)" at 7026.6,134.6 h60
  text "PTH" at 8176.26,134.6 h60
  text "Round" at 8682.14,134.6 h60
  text "10" at 6426.76,-15.4 h60
  text "40.00mil (1.016mm)" at 7026.6,-15.4 h60
  text "PTH" at 8176.26,-15.4 h60
  text "Round" at 8682.14,-15.4 h60
  text "B" at 5891.79,-25.39 h66.67
  text "10" at 6426.76,-165.4 h60
  text "42.91mil (1.090mm)" at 7026.6,-165.4 h60
  text "PTH" at 8176.26,-165.4 h60
  text "Round" at 8682.14,-165.4 h60
  text "23" at 6426.76,-315.4 h60
  text "12.00mil (0.305mm)" at 7026.6,-315.4 h60
  text "PTH" at 8176.26,-315.4 h60
  text "Round" at 8682.14,-315.4 h60
  text "24" at 6426.76,-465.4 h60
  text "20.00mil (0.508mm)" at 7026.6,-465.4 h60
  text "PTH" at 8176.26,-465.4 h60
  text "Round" at 8682.14,-465.4 h60
  text "29" at 6426.76,-615.4 h60
  text "35.43mil (0.900mm)" at 7026.6,-615.4 h60
  text "PTH" at 8176.26,-615.4 h60
  text "Round" at 8682.14,-615.4 h60
  text "64" at 6426.76,-765.4 h60
  text "15.00mil (0.381mm)" at 7026.6,-765.4 h60
  text "PTH" at 8176.26,-765.4 h60
  text "Round" at 8682.14,-765.4 h60
  text "207 Total" at 6426.76,-915.4 h60
  text "DANIEL HAHAJ" at 5862.2,-1238.44 h100
  text "DETEX CORP" at 5862.2,-1394.4 h100
  text "302 DETEX DR" at 5862.2,-1550.36 h100
  text "NEW BRAUNFELS, TX 78130" at 5862.2,-1706.32 h100
  text "830-629-2900" at 5862.2,-1862.28 h100
  text "P/N 107026" at 5858,-2021.4 h100
  text "BOARD SPECS: / LEAD-FREE HASL FINISH" at 5840.8,-3025 h100

## Dimensions
4840,-2025 to 4940,-1925 on Drill Drawing
0,-2025 to 0,-770 on Drill Drawing
0,-2025 to 0,-1350 on Drill Drawing
4936.03,-1918.44 to 4940,-100 on Drill Drawing
4836.03,-2018.44 to -3.97,-2018.44 on Drill Drawing
4840,-2025 to 4840,0 on Drill Drawing
0,-2025 to 4936.03,-1918.44 on Drill Drawing

## Text inside footprints (layer, text, board x,y; h text height)
BR1: Bottom Overlay "AC" at 4740.28,-1250.76 h30 r180; Bottom Overlay "AC" at 4539.49,-1250.76 h30 r180; Bottom Overlay "-" at 4547.37,-1404.3 h60 r180; Bottom Overlay "+" at 4748.15,-1404.3 h60 r180
C4: Top Overlay "+" at 3476.34,-1938.86 h60 r180
C5: Top Overlay "+" at 2485.08,-1951.61 h60 r180
C28: Top Overlay "+" at 3902.91,-1943.86 h60 r180
CONN1: Top Overlay "+" at 1926.55,-1928.71 h40 r180
CONN3: Top Overlay "+" at 3112.72,-289.49 h40 r90
CONN4: Top Overlay "+" at 2977.72,-289.49 h40 r90
CONN6: Top Overlay "+" at 1010.86,-165.62 h30
CONN7: Top Overlay "+" at 1749.49,-62.28 h30 r180
K1: Top Overlay "NC" at 3812.51,-813.34 h50; Top Overlay "NO" at 4207.5,-816.1 h50; Top Overlay "C" at 4032.65,-812.78 h50
K2: Top Overlay "C" at 3869.03,-577.78 h50; Top Overlay "NO" at 4043.88,-581.1 h50; Top Overlay "NC" at 3648.89,-578.34 h50
K3: Top Overlay "NC" at 3764.67,-1383.34 h50; Top Overlay "NO" at 4159.67,-1386.1 h50; Top Overlay "C" at 3984.82,-1382.78 h50
P8: Bottom Overlay "8" at 3062.84,-648.8 h40 r90; Bottom Overlay "4" at 2845,-648.8 h40 r90; Bottom Overlay "1" at 2831.79,-1158 h40 r90; Bottom Overlay "5" at 3050.32,-1151.32 h40 r90